# Altium PCB AVR Board 4.0 R1.2 Alternate.PcbDoc (part 1 of 2)
Units mil, origin at the board's own origin, x right, y up, seen from the top; angles counter-clockwise.
Board outline 5050 x 3125 mil, 2 copper layers (Top Layer, Bottom Layer); 127 components, 141 nets, 588 pads, 126 vias.
Unrouted connection lines stored in the file: 100.
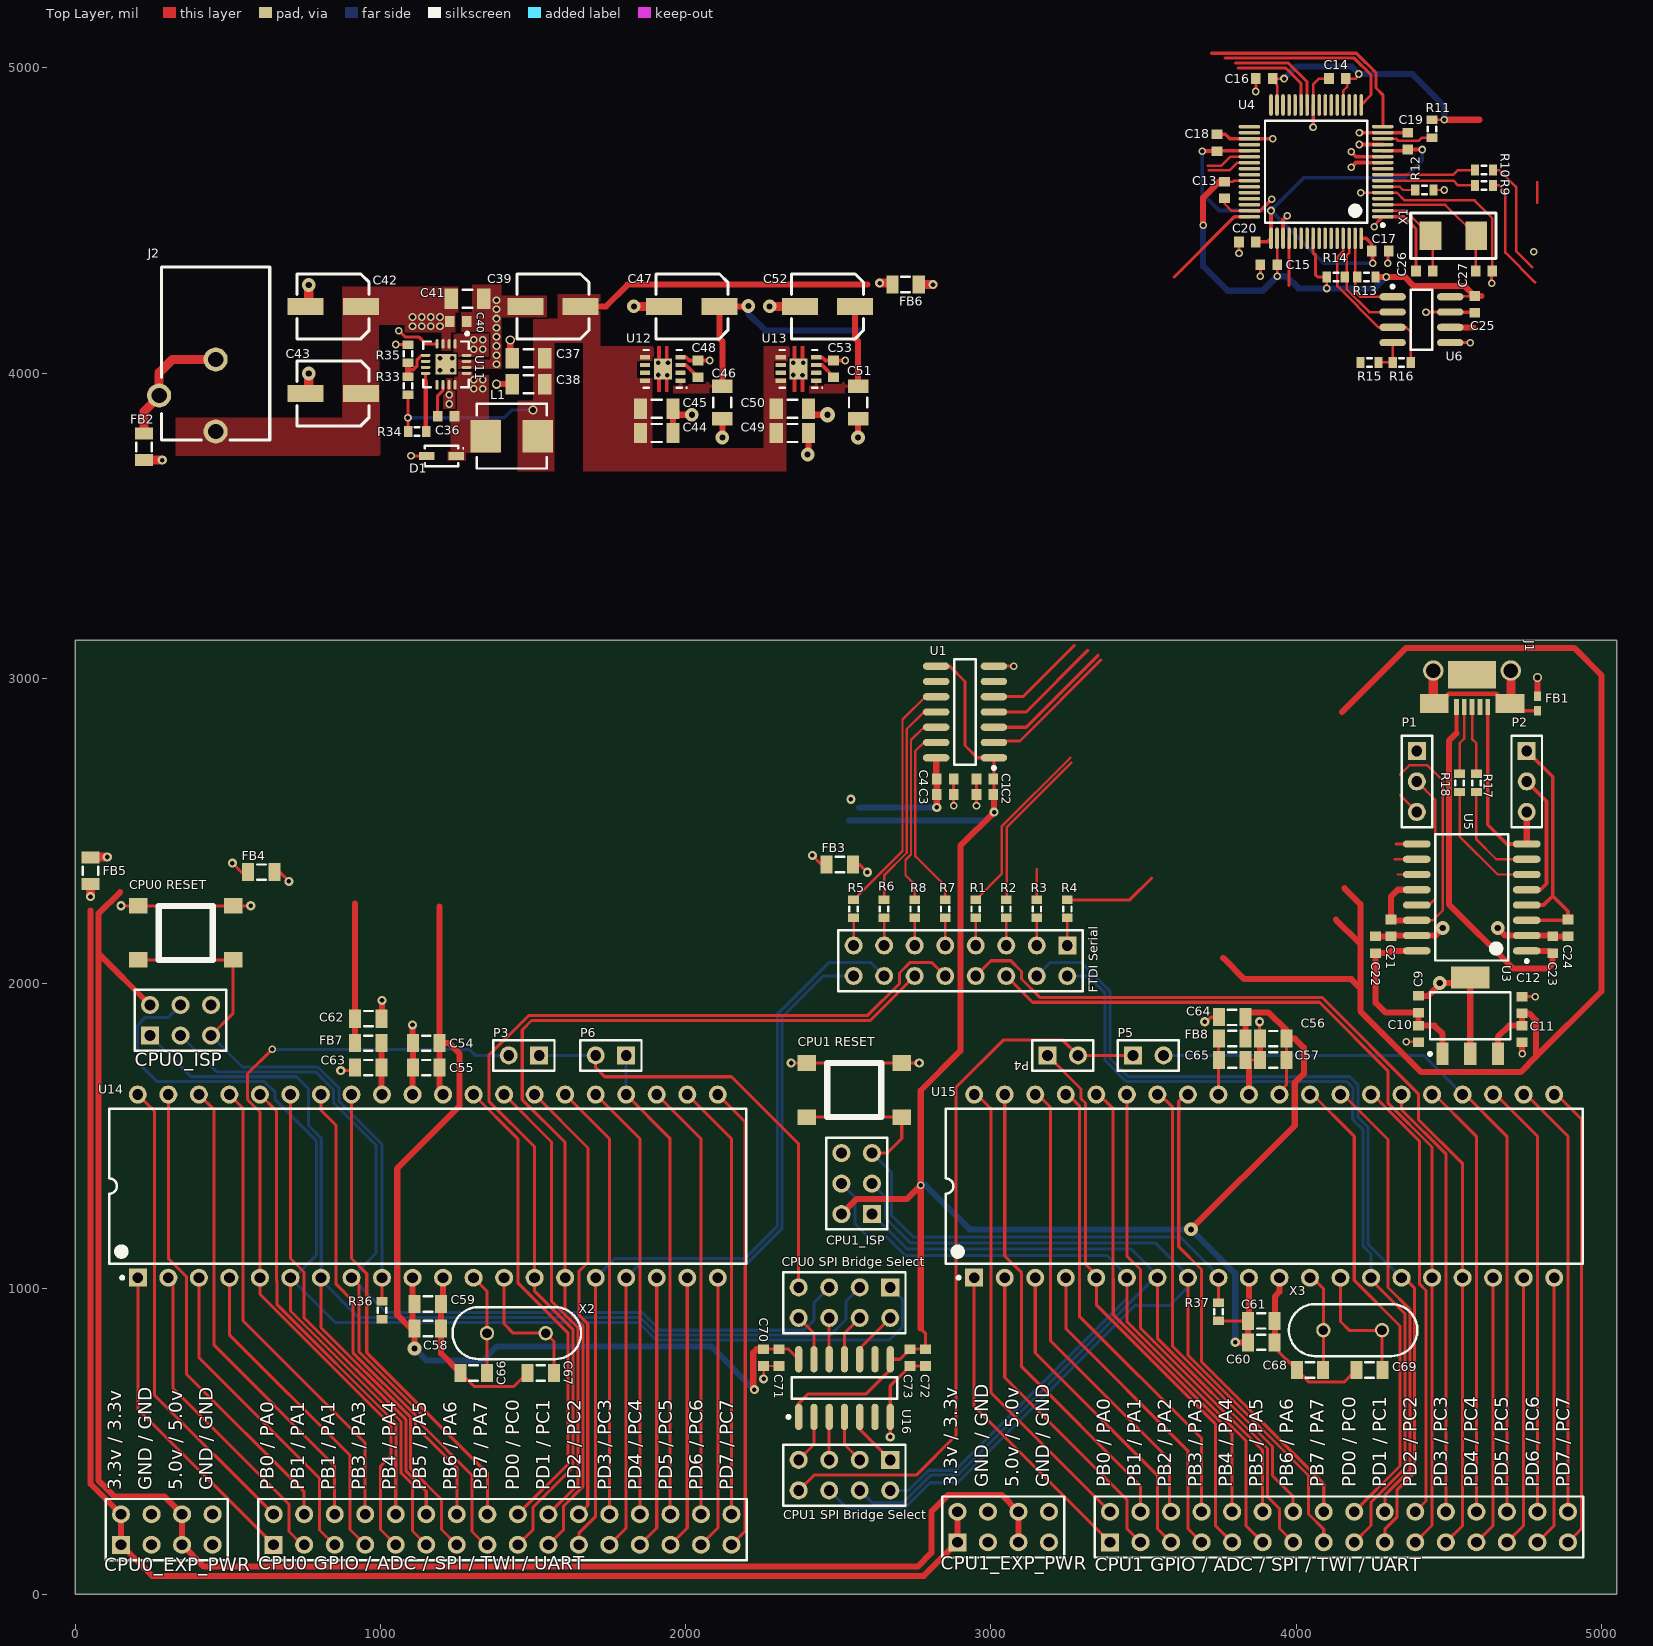
[diagram p0: Top Layer view]
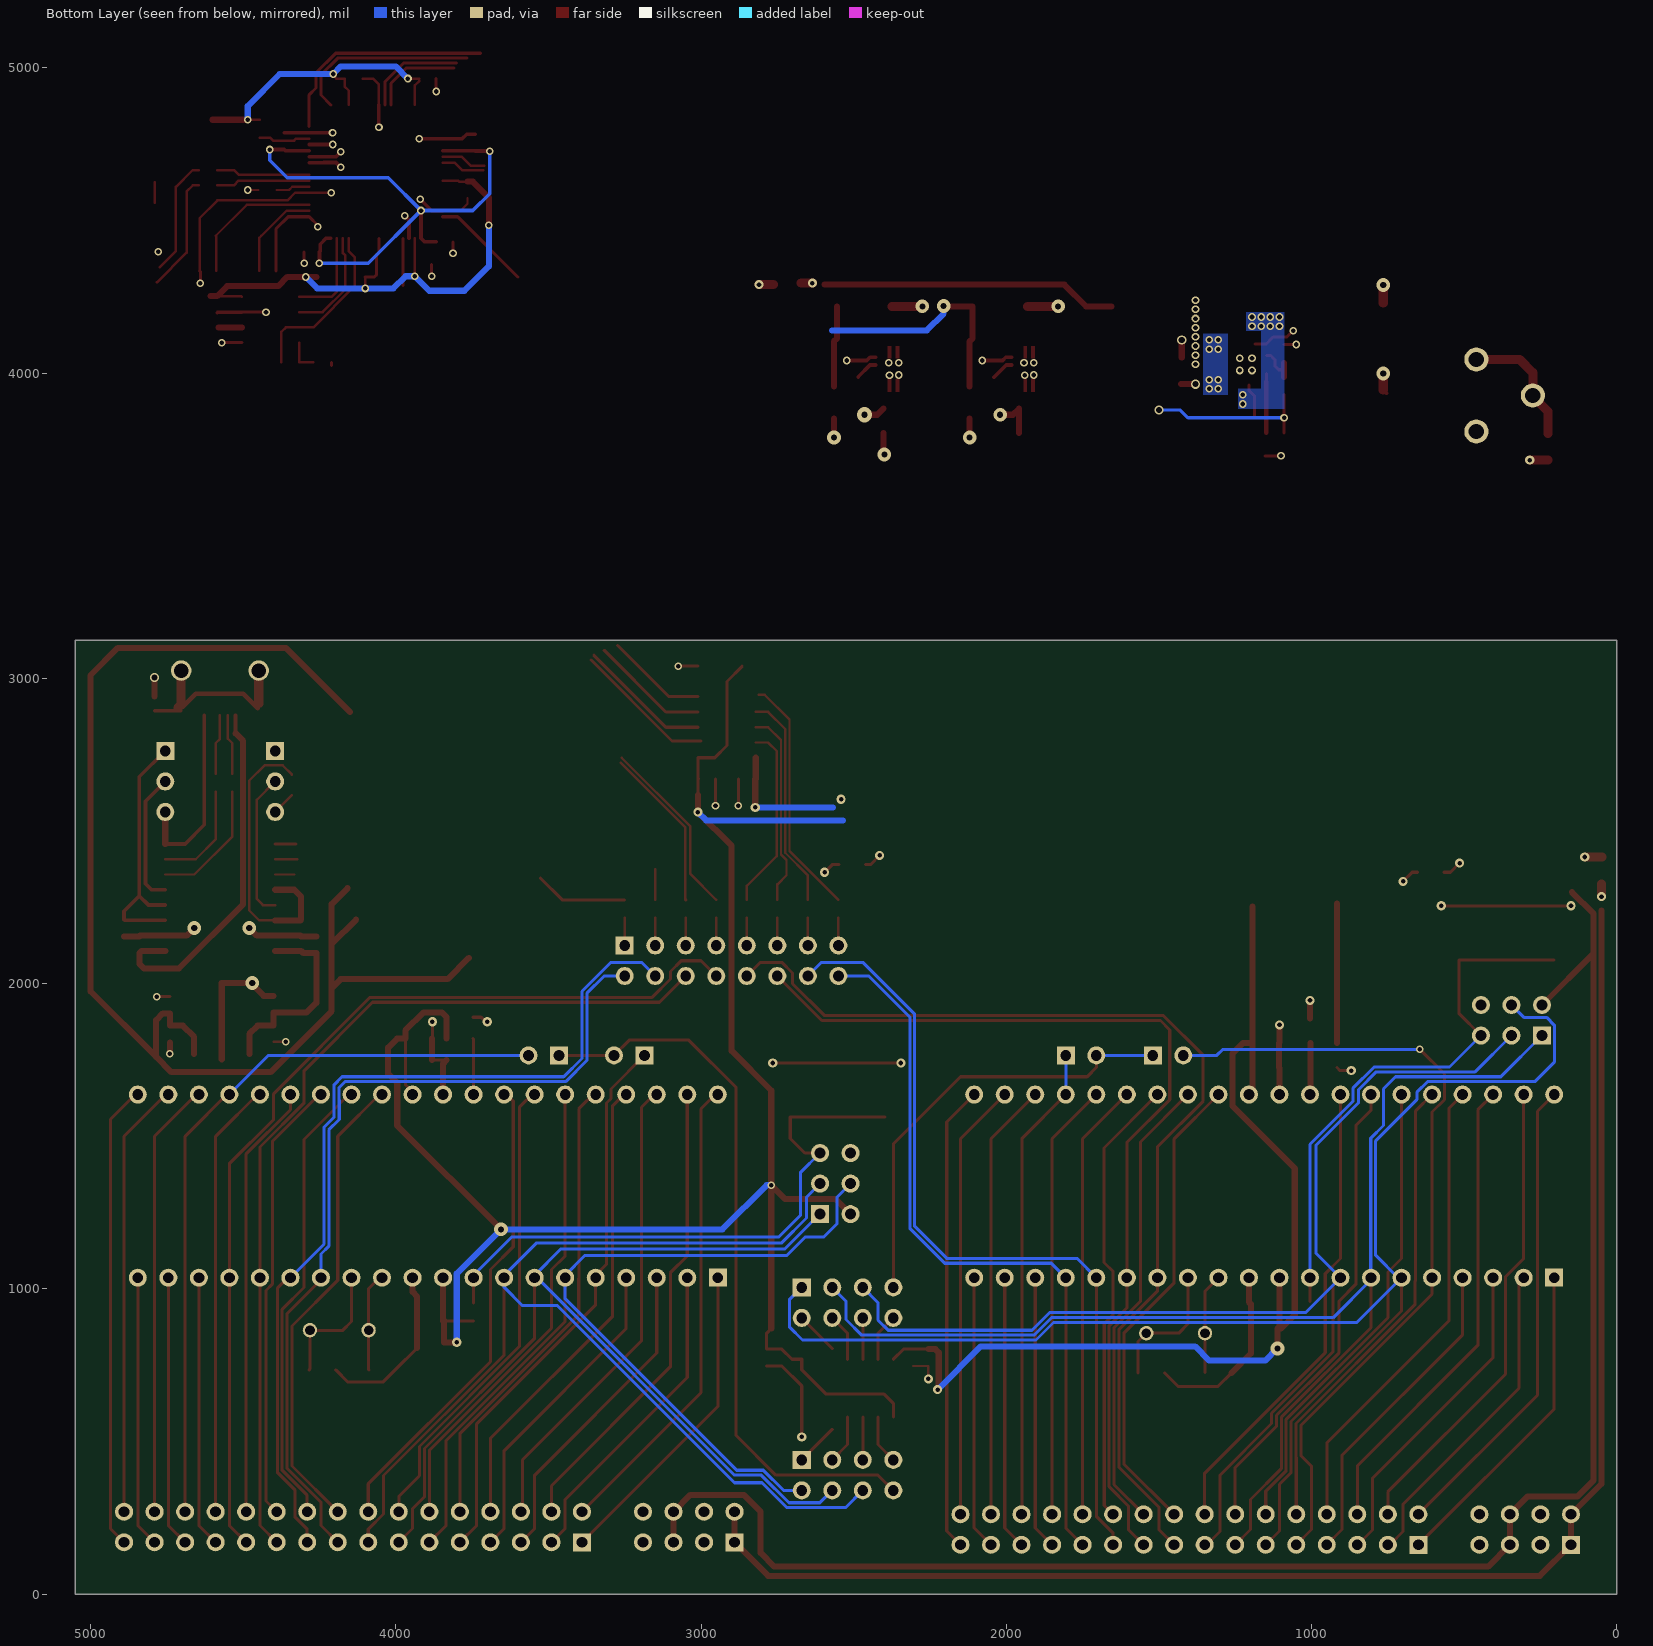
[diagram p1: Bottom Layer view, seen from below]

## Layer stack, top to bottom
Top Layer: signal copper 1.4
Dielectric: dielectric 12.6, FR-4, Dk 4.8
Bottom Layer: signal copper 1.4

## Board outline
0,0 0,3125 5050,3125 5050,0

## Design rules (kind name [scope] priority, off if disabled: settings)
Clearance [All] p1: gap=6
ComponentClearance [All] p1: gap=0 collisioncheckmode=3 verticalgap=10 showdistances=FALSE
FanoutControl Fanout_SOIC [(InComponent('U8') AND InComponent('U7'))] p3: bgadir=Out bgaviamode=Centered fanoutstyle=Staggered fanoutdirection=Alternating viagrid=1 // Fanout_SOIC (Default Rule)
FanoutControl Fanout_Small [All] p4: bgadir=Out bgaviamode=Centered fanoutstyle=Auto fanoutdirection=Alternating viagrid=1 // Fanout_Small (Default Rule)
HoleSize [All] p1: absolutevalues=TRUE maxlimit=120 minlimit=1 maxpercent=80.000 minpercent=20.000
MinimumSolderMaskSliver [All] p1 off: minsoldermaskwidth=10
MinimumSolderMaskSliver SilkscreenOverComponentPads [All] p2 off: minsoldermaskwidth=10
PlaneConnect [All] p1: planeconnectstyle=Direct reliefexpansion=20 reliefentries=4 reliefconductorwidth=10 reliefairgap=10
PolygonConnect PGND [InNet('PGND')] p1: connectstyle=Direct reliefconductorwidth=10 reliefentries=4 polygonreliefangle="90 Angle" airgapwidth=10
PolygonConnect PolygonConnect_3 [InNet('5VCC')] p2: connectstyle=Direct reliefconductorwidth=10 reliefentries=4 polygonreliefangle="90 Angle" airgapwidth=10
PolygonConnect PolygonConnect_2 [InNet('SW')] p3: connectstyle=Direct reliefconductorwidth=10 reliefentries=4 polygonreliefangle="90 Angle" airgapwidth=10
PolygonConnect PolygonConnect_1 [InNet('VIN')] p4: connectstyle=Direct reliefconductorwidth=10 reliefentries=4 polygonreliefangle="90 Angle" airgapwidth=10
PolygonConnect [All] p5: connectstyle=Relief reliefconductorwidth=10 reliefentries=4 polygonreliefangle="90 Angle" airgapwidth=10
RoutingVias [All] p1: holewidth=15 width=25 viastyle="Through Hole" minholewidth=15 minwidth=25 maxholewidth=28 maxwidth=50
SilkToSilkClearance [All] p1 off: silktosilkclearance=10
SolderMaskExpansion [All] p1: expansion=4
Width [All] p1: maxlimit=30 minlimit=6 preferedwidth=6 minimp=50.000000 maximp=50.000000 favimp=50.000000
21 further rules are at their usual default settings.

## Classes and differential pairs
component class Designator: C1 C2 C3 C4 C9 C10 C11 C12 C13 C14 C15 C16 C17 C18 C19 C20 C21 C22 C23 C24 C25 C26 C27 "CPU 1" "CPU 2" FB1 J1 P1 P2 R1 R2 R3 R4 R5 R6 R7 R8 R9 R10 R11 R12 R13 R14 R15 R16 R17 R18 U1 U3 U4 U5 U6 X1

## Components (designator, comment, footprint, x,y, rotation, side; value= is the part's Value field where it differs from the comment)
C1 "0603" 1608[0603] 2980,2670 r0 top
C2 "0603" 1608[0603] 2980,2620 r0 top
C3 "0603" 1608[0603] 2850,2620 r180 top
C4 "0603" 1608[0603] 2850,2670 r180 top
C9 "0603" 1608[0603] 4400,1932.5 r270 top
C10 "0603" 1608[0603] 4400,1835 r90 top
C11 "0603" 1608[0603] 4740,1835 r90 top
C12 "0603" 1608[0603] 4740,1930 r270 top
C13 "0603" 1608[0603] 3765,4600 r90 top
C14 "0603" 1608[0603] 4135,4965 r0 top
C15 "0603" 1608[0603] 3910,4355 r0 top
C16 "0603" 1608[0603] 3895,4965 r0 top
C17 "0603" 1608[0603] 4275,4400 r180 top
C18 "0603" 1608[0603] 3740,4755 r270 top
C19 "0603" 1608[0603] 4365,4760 r270 top
C20 "0603" 1608[0603] 3840,4430 r0 top
C21 "0603" 1608[0603] 4310,2182.5 r90 top
C22 "0603" 1608[0603] 4260,2127.5 r270 top
C23 "0603" 1608[0603] 4840,2127.5 r270 top
C24 "0603" 1608[0603] 4890,2182.5 r90 top
C25 "0603" 1608[0603] 4585,4225 r90 top
C26 "0603" 1608[0603] 4420,4335 r0 top
C27 "0603" 1608[0603] 4615,4335 r180 top
C36 "Cap Semi" 1608[0603] 1215,3858.78 r180 top
C37 "1206" C1206 1485,4048.78 r0 top
C38 "Cap Semi" C1206 1485,3963.78 r180 top
C39 "VS C" "Panasonic VS C" 1445,4103.78 r0 top
C40 "0603" 1608[0603] 1255,4168.78 r180 top
C41 "1206" C1206 1285,4243.78 r180 top
C42 "VS C" "Panasonic VS C" 725,4103.78 r0 top
C43 "VS C" "Panasonic VS C" 725,3818.78 r0 top
C44 "1206 Tantulum" C1206 1905,3803.78 r0 top
C45 "1206 Tantulum" C1206 1905,3883.78 r180 top
C46 "1206 Tantulum" C1206 2120,3903.78 r270 top
C47 "VS C" "Panasonic VS C" 1900,4103.78 r0 top
C48 "0603" 1608[0603] 2040,4013.78 r270 top
C49 "1206 Tantulum" C1206 2349.45,3803.78 r0 top
C50 "1206 Tantulum" C1206 2349.45,3883.78 r180 top
C51 "1206 Tantulum" C1206 2564.45,3903.78 r270 top
C52 "VS C" "Panasonic VS C" 2344.45,4103.78 r0 top
C53 "0603" 1608[0603] 2484.45,4013.78 r270 top
C54 "0805" "SM 0805 - gap trimmed" 1150,1805 r0 top
C55 "0805" "SM 0805 - gap trimmed" 1150,1725 r0 top
C56 "0805" "SM 0805 - gap trimmed" 3925,1820 r0 top
C57 "0805" "SM 0805 - gap trimmed" 3925,1750 r0 top
C58 "0805" "SM 0805 - gap trimmed" 1155,870 r180 top
C59 "0805" "SM 0805 - gap trimmed" 1155,950 r180 top
C60 "0805" "SM 0805 - gap trimmed" 3885,825 r180 top
C61 "0805" "SM 0805 - gap trimmed" 3885,895 r180 top
C62 "0805" "SM 0805 - gap trimmed" 960,1885 r180 top
C63 "0805" "SM 0805 - gap trimmed" 960,1725 r0 top
C64 "0805" "SM 0805 - gap trimmed" 3790,1890 r0 top
C65 "0805" "SM 0805 - gap trimmed" 3790,1750 r180 top
C66 "0805" "SM 0805 - gap trimmed" 1305,725 r0 top
C67 "0805" "SM 0805 - gap trimmed" 1525,725 r0 top
C68 "0805" "SM 0805 - gap trimmed" 4045,735 r0 top
C69 "0805" "SM 0805 - gap trimmed" 4240,735 r0 top
C70 "0603" 1608[0603] 2255,775 r90 top
C71 "0603" 1608[0603] 2305,775 r90 top
C72 "0603" 1608[0603] 2785,775 r90 top
C73 "0603" 1608[0603] 2735,775 r90 top
"CPU0 GPIO / ADC / SPI / TWI / UART" "Header 16X2" HDR2X16 650,161.72 r0 top
"CPU0 RESET" "Tactile Switch" "Mountain Switch TS6324T1607" 490,2255 r270 top
"CPU0 SPI Bridge Select" "Header 4X2" HDR2X4 2670,1005 r180 top
CPU0_EXP_PWR "Header 4X2" HDR2X4 150,161.72 r0 top
CPU0_ISP "Header 3X2" HDR2X3 245,1830 r0 top
"CPU1 GPIO / ADC / SPI / TWI / UART" "Header 16X2" HDR2X16 3390,170 r0 top
"CPU1 RESET" "Tactile Switch" "Mountain Switch TS6324T1607" 2680,1740 r270 top
"CPU1 SPI Bridge Select" "Header 4X2" HDR2X4 2670,440 r180 top
CPU1_EXP_PWR "Header 4X2" HDR2X4 2890,170 r0 top
CPU1_ISP "Header 3X2" HDR2X3 2610,1245 r90 top
D1 "PMEG1030EH_EJ" PMEG1030EH_EJ 1200,3728.78 r0 top
FB1 "BLM18PG121SN1D" BLM18PG121SN1D 4790,2917.5 r90 top
FB2 "MI0805L301R-10" "SM 0805 - gap trimmed" 225,3758.78 r90 top
FB3 "MI0805L301R-10" "SM 0805 - gap trimmed" 2505,2390 r180 top
FB4 "MI0805L301R-10" "SM 0805 - gap trimmed" 610,2365 r180 top
FB5 "MI0805L301R-10" "SM 0805 - gap trimmed" 50,2370 r90 top
FB6 "MI0805L301R-10" "SM 0805 - gap trimmed" 2720,4290 r180 top
FB7 "Inductor" "SM 0805 - gap trimmed" 960,1805 r0 top
FB8 "Inductor" "SM 0805 - gap trimmed" 3790,1820 r180 top
"FTDI Serial" "Header 8X2" HDR2X8 3250,2125 r180 top
J1 "DX4R005J91R5100" "Micro USB Circular Holes Only" 4575,3065 r180 top
J2 "Center-positive 2.1 mm power jack" PJ-102AH 460,3808.78 r0 top
L1 "Inductor" CIP0530LR3R3 1430,3793.78 r0 top
P1 "Header 3" HDR1X3 4395,2762.5 r270 top
P2 "Header 3" HDR1X3 4755,2762.5 r270 top
P3 "Header 2" HDR1X2 1520,1765 r180 top
P4 "Header 2" HDR1X2 3185,1765 r0 top
P5 "Header 2" HDR1X2 3465,1765 r0 top
P6 "Header 2" HDR1X2 1805,1765 r180 top
R1 "0603" J1-0603 2950,2245 r270 top
R2 "0603" J1-0603 3050,2245 r270 top
R3 "0603" J1-0603 3150,2245 r270 top
R4 "0603" J1-0603 3250,2245 r270 top
R5 "0603" J1-0603 2550,2245 r270 top
R6 "0603" J1-0603 2650,2245 r270 top
R7 "0603" J1-0603 2850,2245 r270 top
R8 "0603" J1-0603 2750,2245 r270 top
R9 "0603" J1-0603 4615,4615 r180 top
R10 "0603" J1-0603 4615,4665 r180 top
R11 "0603" J1-0603 4445,4800 r90 top
R12 "0603" J1-0603 4420,4600 r0 top
R13 "0603" J1-0603 4230,4315 r0 top
R14 "0603" J1-0603 4130,4315 r180 top
R15 "0603" J1-0603 4240,4035 r180 top
R16 "0603" J1-0603 4345,4035 r0 top
R17 "0603" J1-0603 4590,2657.5 r270 top
R18 "0603" J1-0603 4535,2657.5 r270 top
R33 "Res3" J1-0603 1090,3958.78 r270 top
R34 "Res3" J1-0603 1120,3808.78 r0 top
R35 "Res3" J1-0603 1090,4063.78 r270 top
R36 "Res3" J1-0603 1005,930 r270 top
R37 "Res3" J1-0603 3745,925 r270 top
U1 "TXS0104E" SOIC127P600X175-14N 2915,2890 r180 top
U3 "UA78M05" SOT230P700X180-4N 4570,1895 r90 top
U4 "FT4232HL-Tray" LQFP-64_N 4065,4660 r180 top
U5 "ADuM4160" ADuM4160 4575,2282.5 r180 top
U6 "AT93C46" SOIC127P600X175-8N 4410,4175 r0 top
U11 "MIC24085" MIC24085-AYML 1215,4028.78 r270 top
U12 "TPS73733QDRBRQ1" TI-DRB8-1750X1500TP_V 1925,4013.78 r180 top
U13 "TPS73733QDRBRQ1" TI-DRB8-1750X1500TP_V 2369.45,4013.78 r180 top
U14 "ATmega1284-PU" 40P6 1155,1336.72 r90 top
U15 "ATmega1284-PU" 40P6 3895,1336.72 r90 top
U16 "TXS0104E" SOIC127P600X175-14N 2520,675 r90 top
X1 "12MHZ" 445C35A12M00000 4440,4450 r0 top
X2 "18.432MHZ" "radial 4.88" 1445,855 r0 top
X3 "18.432MHZ" "radial 4.88" 4185,865 r0 top

## Footprints (in the part's own frame and the unit in brackets; to place one, negate y for a bottom-side part, rotate by r counter-clockwise, add the part's x,y. Pads: shape width x height; smd on the part's side, far side on the other; paste and mask are expansions set on the pad)
40P6 [mm] "40-Pin Ceramic Dual In-Line Package (CerDIP)"
  rect 1.5x1.5 hole 0.9: 1(-7.62,24.13)
  round 1.5 hole 0.9: 2(-7.62,21.59) 3(-7.62,19.05) 4(-7.62,16.51) 5(-7.62,13.97) 6(-7.62,11.43) 7(-7.62,8.89) 8(-7.62,6.35) 9(-7.62,3.81) 10(-7.62,1.27) 11(-7.62,-1.27) 12(-7.62,-3.81) 13(-7.62,-6.35) 14(-7.62,-8.89) 15(-7.62,-11.43) 16(-7.62,-13.97) 17(-7.62,-16.51) 18(-7.62,-19.05) 19(-7.62,-21.59) 20(-7.62,-24.13) 21(7.62,-24.13) 22(7.62,-21.59) 23(7.62,-19.05) 24(7.62,-16.51) 25(7.62,-13.97) 26(7.62,-11.43) 27(7.62,-8.89) 28(7.62,-6.35) 29(7.62,-3.81) 30(7.62,-1.27) 31(7.62,1.27) 32(7.62,3.81) 33(7.62,6.35) 34(7.62,8.89) 35(7.62,11.43) 36(7.62,13.97) 37(7.62,16.51) 38(7.62,19.05) 39(7.62,21.59) 40(7.62,24.13)
  silkscreen extent -7.74,-26.5 6.45,26.5, body extent -7.05,-26.47 7.05,26.47, height 4.83
445C35A12M00000 [mm] "Crystal Oscillator"
  rect 1.8x2.4 smd: 1(0,0) 2(3.8,0)
  silkscreen extent -1.65,-1.91 5.46,1.91, body extent -1.27,-1.52 5.08,1.52, height 1
1608[0603] [mm] "Chip Capacitor, Body 1.6x0.8mm, IPC High Density"
  rect 0.8x0.9 smd: 1(-0.7,0) 2(0.7,0)
  body extent -0.87,-0.48 0.87,0.48, height 1.3
ADuM4160 [mm] "SOIC, 16-Leads, Body 10.30x7.50mm, Pitch 1.27mm, IPC Medium Density"
  oval 2.3x0.6 smd: 1(-4.575,4.445) 2(-4.575,3.175) 3(-4.575,1.905) 4(-4.575,0.635) 5(-4.575,-0.635) 6(-4.575,-1.905) 7(-4.575,-3.175) 8(-4.575,-4.445) 9(4.575,-4.445) 10(4.575,-3.175) 11(4.575,-1.905) 12(4.575,-0.635) 13(4.575,0.635) 14(4.575,1.905) 15(4.575,3.175) 16(4.575,4.445)
  silkscreen extent -4.7,-5.25 3.03,5.42, body extent -3.8,-5.25 3.8,5.25, height 2.65
BLM18PG121SN1D [mm] "Chip Inductor, 2-Leads, Body 1.0x0.5mm, IPC Medium Density"
  rect 0.8x0.6 smd: 1(-0.6,0) 2(0.6,0)
  body extent -0.52,-0.28 0.53,0.27, height 0.6
C1206 [mm] "Chip Capacitor, Body 3.2x1.6mm, IPC High Density"
  rect 1.1x1.7 smd: 1(-1.35,0) 2(1.35,0)
  silkscreen extent -0.4,-0.75 0.4,0.75, body extent -1.7,-0.9 1.7,0.9, height 1.3
CIP0530LR3R3 [mm] "Precision Wire Wound Inductor, 2-Leads, Body 5.58x5.30mm, IPC Medium Density"
  rect 2.55x2.7 smd: 1(-2.175,0) 2(2.175,0)
  silkscreen extent -2.9,-2.7 2.9,2.7, body extent -2.88,-2.7 2.88,2.7, height 2.29
HDR1X2 [mm] "Connector; Header; 2 Position"
  rect 1.5x1.5 hole 0.9: 1(0,0)
  round 1.5 hole 0.9: 2(2.54,0)
  silkscreen extent -1.27,-1.27 3.81,1.27
HDR1X3 [mm] "Connector; Header; 3 Position"
  rect 1.5x1.5 hole 0.9: 1(0,0)
  round 1.5 hole 0.9: 2(2.54,0) 3(5.08,0)
  silkscreen extent -1.27,-1.27 6.35,1.27
HDR2X3 [mm] "Connector; Header; 3x2 Position"
  rect 1.5x1.5 hole 0.9: 1(0,0)
  round 1.5 hole 0.9: 2(0,2.54) 3(2.54,0) 4(2.54,2.54) 5(5.08,0) 6(5.08,2.54)
  silkscreen extent -1.27,-1.27 6.35,3.81
HDR2X4 [mm] "Connector; Header; 4x2 Position"
  rect 1.5x1.5 hole 0.9: 1(0,0)
  round 1.5 hole 0.9: 2(0,2.54) 3(2.54,0) 4(2.54,2.54) 5(5.08,0) 6(5.08,2.54) 7(7.62,0) 8(7.62,2.54)
  silkscreen extent -1.27,-1.27 8.89,3.81
HDR2X8 [mm] "Connector; Header; 8x2 Position"
  rect 1.5x1.5 hole 0.9: 1(0,0)
  round 1.5 hole 0.9: 2(0,2.54) 3(2.54,0) 4(2.54,2.54) 5(5.08,0) 6(5.08,2.54) 7(7.62,0) 8(7.62,2.54) 9(10.16,0) 10(10.16,2.54) 11(12.7,0) 12(12.7,2.54) 13(15.24,0) 14(15.24,2.54) 15(17.78,0) 16(17.78,2.54)
  silkscreen extent -1.27,-1.27 19.05,3.81
HDR2X16 [mm] "Connector; Header; 16x2 Position"
  rect 1.5x1.5 hole 0.9: 1(0,0)
  round 1.5 hole 0.9: 2(0,2.54) 3(2.54,0) 4(2.54,2.54) 5(5.08,0) 6(5.08,2.54) 7(7.62,0) 8(7.62,2.54) 9(10.16,0) 10(10.16,2.54) 11(12.7,0) 12(12.7,2.54) 13(15.24,0) 14(15.24,2.54) 15(17.78,0) 16(17.78,2.54) 17(20.32,0) 18(20.32,2.54) 19(22.86,0) 20(22.86,2.54) 21(25.4,0) 22(25.4,2.54) 23(27.94,0) 24(27.94,2.54) 25(30.48,0) 26(30.48,2.54) 27(33.02,0) 28(33.02,2.54) 29(35.56,0) 30(35.56,2.54) 31(38.1,0) 32(38.1,2.54)
  silkscreen extent -1.27,-1.27 39.37,3.81
J1-0603 [mm] "Chip Resistor, Body 1.6x0.8mm, IPC High Density"
  rect 0.7x0.9 smd: 1(-0.75,0) 2(0.75,0)
  silkscreen extent -0.2,-0.35 0.2,0.35, body extent -0.85,-0.48 0.85,0.48, height 0.9
LQFP-64_N [mm] "Thin QFP, 64-Leads, Body 10x10mm, Pitch 0.5mm, IPC Medium Density"
  oval 1.8x0.3 smd: 1(-5.55,3.75) 2(-5.55,3.25) 3(-5.55,2.75) 4(-5.55,2.25) 5(-5.55,1.75) 6(-5.55,1.25) 7(-5.55,0.75) 8(-5.55,0.25) 9(-5.55,-0.25) 10(-5.55,-0.75) 11(-5.55,-1.25) 12(-5.55,-1.75) 13(-5.55,-2.25) 14(-5.55,-2.75) 15(-5.55,-3.25) 16(-5.55,-3.75) 33(5.55,-3.75) 34(5.55,-3.25) 35(5.55,-2.75) 36(5.55,-2.25) 37(5.55,-1.75) 38(5.55,-1.25) 39(5.55,-0.75) 40(5.55,-0.25) 41(5.55,0.25) 42(5.55,0.75) 43(5.55,1.25) 44(5.55,1.75) 45(5.55,2.25) 46(5.55,2.75) 47(5.55,3.25) 48(5.55,3.75)
  oval 0.3x1.8 smd: 17(-3.75,-5.55) 18(-3.25,-5.55) 19(-2.75,-5.55) 20(-2.25,-5.55) 21(-1.75,-5.55) 22(-1.25,-5.55) 23(-0.75,-5.55) 24(-0.25,-5.55) 25(0.25,-5.55) 26(0.75,-5.55) 27(1.25,-5.55) 28(1.75,-5.55) 29(2.25,-5.55) 30(2.75,-5.55) 31(3.25,-5.55) 32(3.75,-5.55) 49(3.75,5.55) 50(3.25,5.55) 51(2.75,5.55) 52(2.25,5.55) 53(1.75,5.55) 54(1.25,5.55) 55(0.75,5.55) 56(0.25,5.55) 57(-0.25,5.55) 58(-0.75,5.55) 59(-1.25,5.55) 60(-1.75,5.55) 61(-2.25,5.55) 62(-2.75,5.55) 63(-3.25,5.55) 64(-3.75,5.55)
  silkscreen extent -5.68,-4.25 4.25,4.57, body extent -5,-5 5,5, height 1.6
MIC24085-AYML [mm] "QFN, 16-Leads, Body 3.25x3.25mm, Pitch 0.50mm, Thermal Pad 1.73x1.73mm, IPC Medium Density"
  oval 0.8x0.25 smd: 1(-1.7,0.75) 2(-1.7,0.25) 3(-1.7,-0.25) 4(-1.7,-0.75) 9(1.7,-0.75) 10(1.7,-0.25) 11(1.7,0.25) 12(1.7,0.75)
  oval 0.25x0.8 smd: 5(-0.75,-1.7) 6(-0.25,-1.7) 7(0.25,-1.7) 8(0.75,-1.7) 13(0.75,1.7) 14(0.25,1.7) 15(-0.25,1.7) 16(-0.75,1.7)
  rect 1.73x1.73 smd: 17(0,0)
  silkscreen extent -2.67,-1.9 1.9,1.9, body extent -1.75,-1.75 1.75,1.75, height 0.85
"Micro USB Circular Holes Only" [mm]
  rect 0.4x1.35 smd: 1(1.275,4.025) 2(0.625,4.025) 3(-0.025,4.025) 4(-0.675,4.025) 5(-1.325,4.025)
  rect 2.4x1.6 smd: 6(3.125,3.75) 9(-3.175,3.75)
  round 1.7 hole 1.2: 7(3.2,1) 8(-3.25,1)
  rect 4x2.3 smd: GND(-0.025,1.35)
  body extent -4.1,-1.64 4.1,3.79, height 2.73
"Mountain Switch TS6324T1607" [mm]
  rect 1.3x1.55 smd: 1(0,0.7) 1(0,-7.2) 2(4.5,0.7) 2(4.5,-7.2)
  silkscreen extent 0,-5.5 4.5,-1
"Panasonic VS C" [mm]
  rect 3x1.4 smd: 1(5.348,2.921) 2(0.748,2.921)
  silkscreen extent 0.05,0.22 6.05,5.62
PJ-102AH [mm] "Center positive 2.1 mm power jack"
  round 2 hole 1.27: 1(0,0) 2(0,6) 3(-4.7,3)
  silkscreen extent -4.5,-0.7 4.5,13.7, body extent -5.8,-0.7 4.5,13.7, height 11
PMEG1030EH_EJ [mm] "Molded Diode, 2-Leads, Body 2.60x1.60mm, IPC Medium Density"
  rect 1.3x0.65 smd: 1(-1.225,0) 2(1.225,0)
  silkscreen extent -1.4,-0.85 1.85,0.85, body extent -1.35,-0.85 1.35,0.85, height 1.2
"radial 4.88" [mm]
  round 1.2 hole 0.8: 1(-2.44,0) 2(2.44,0)
  silkscreen extent -5.3,-2.16 5.38,2.16
"SM 0805 - gap trimmed" [mm]
  rect 1x1.5 smd: 1(-1.1,0) 2(1.1,0)
  silkscreen extent -0.36,-0.64 0.35,0.63
SOIC127P600X175-8N [mm] "SOIC, 8-Leads, Body 4.90x3.90mm, Pitch 1.27mm, IPC Medium Density"
  oval 2.2x0.6 smd: 1(-2.4,1.905) 2(-2.4,0.635) 3(-2.4,-0.635) 4(-2.4,-1.905) 5(2.4,-1.905) 6(2.4,-0.635) 7(2.4,0.635) 8(2.4,1.905)
  silkscreen extent -2.52,-2.5 0.9,2.88, body extent -2,-2.5 2,2.5, height 1.75
SOIC127P600X175-14N [mm] "SOIC, 14-Leads, Body 8.65x3.90mm, Pitch 1.27mm, IPC Medium Density"
  oval 2.2x0.6 smd: 1(-2.4,3.81) 2(-2.4,2.54) 3(-2.4,1.27) 4(-2.4,0) 5(-2.4,-1.27) 6(-2.4,-2.54) 7(-2.4,-3.81) 8(2.4,-3.81) 9(2.4,-2.54) 10(2.4,-1.27) 11(2.4,0) 12(2.4,1.27) 13(2.4,2.54) 14(2.4,3.81)
  silkscreen extent -2.53,-4.4 0.9,4.78, body extent -2,-4.4 2,4.4, height 1.75
SOT230P700X180-4N [mm] "SOT223, 4-Leads, Body 6.50x7.00mm (avg), Pitch 2.30mm, IPC Medium Density"
  rect 1.85x1 smd: 1(-3.175,2.3) 2(-3.175,0) 3(-3.175,-2.3)
  rect 1.85x3.2 smd: 4(3.175,0)
  silkscreen extent -3.3,-3.35 1.95,3.47, body extent -1.85,-3.35 1.85,3.35, height 1.8
TI-DRB8-1750X1500TP_V [mm] "SON, 8-Leads, Body 3x3mm, Pitch 0.65mm, Thermal Pad 1.50 x 3.8mm"
  rect 0.85x0.35 smd: 1(-1.475,0.975) 2(-1.475,0.325) 3(-1.475,-0.325) 4(-1.475,-0.975) 5(1.475,-0.975) 6(1.475,-0.325) 7(1.475,0.325) 8(1.475,0.975)
  rect 1.5x1.75 smd: 9(0,0)
  Top Layer region: 0.185,0.875 0.185,1.9 0.465,1.9 0.465,0.875
  Top Layer region: -0.185,-0.875 -0.185,-1.9 -0.465,-1.9 -0.465,-0.875
  Top Layer region: 0.185,-0.875 0.185,-1.9 0.465,-1.9 0.465,-0.875
  Top Layer region: -0.185,0.875 -0.185,1.9 -0.465,1.9 -0.465,0.875
  silkscreen extent -2.02,-1.58 1.57,1.62, body extent -1.5,-1.5 1.5,1.5, height 1

## Part data
C1 C2 C3 C4 C9 C10 C11 C12 C13 C14 C15 C16 C17 C18 C19 C20 C21 C22 C23 C24 C25 C26 C27 C37 C39 C40 C41 C44 C45 C46 C47 C48 C49 C50 C51 C52 C53 C54 C55 C56 C57 C58 C59 C60 C61 C62 C63 C64 C65 C66 C67 C68 C69 C70 C71 C72 C73: library part "Cap Semi", "Capacitor (Semiconductor SIM Model)"
C36 C38: "Capacitor (Semiconductor SIM Model)"
C42 C43: library part "Cap Pol3", "Polarized Capacitor (Surface Mount)"
"CPU0 GPIO / ADC / SPI / TWI / UART" "CPU1 GPIO / ADC / SPI / TWI / UART": "Header, 16-Pin, Dual row"
"CPU0 SPI Bridge Select" CPU0_EXP_PWR "CPU1 SPI Bridge Select" CPU1_EXP_PWR: "Header, 4-Pin, Dual row"
CPU0_ISP CPU1_ISP: "Header, 3-Pin, Dual row"
D1: library part Diode, "Default Diode"
FB2 FB3 FB4 FB5 FB6: library part Inductor, "Inductor"
"FTDI Serial": "Header, 8-Pin, Dual row"
J1: library part "Micro USB", "Micro USB Jack B"
J2: library part PWR2.5, "Power jack"
P1 P2: "Header, 3-Pin"
P3 P4 P5 P6: "Header, 2-Pin"
R1 R2 R3 R4 R5 R6 R7 R8 R9 R10 R11 R12 R13 R14 R15 R16 R17 R18: library part Res3, "Resistor"
R33 R34 R35 R36 R37: "Resistor"
U4: "Quad High Speed USB To Multipurpose UART/MPSSE IC, 64-pin LQFP, Tray"
U5: "USB Opto Isolator"
U12 U13: "Single Output Automotive LDO, 1 A, Fixed 3.3 V Output, 2.2 to 5.5 V Input, with Reverse Current Protection, 8-pin SON (DRB), -40 to 125 degC, Green (RoHS & no Sb/Br)"
U14 U15: "8-bit AVR Microcontroller, 128KB Flash, 4KB EEPROM, 16KB SRAM, 40-pin PDIP, Industrial Grade (-40°C to 85°C)"
X1 X2 X3: library part XTAL, "Crystal Oscillator"

## Via types
v1: diameter 25, hole 15, Top Layer to Bottom Layer, 82 vias
v2: diameter 30, hole 15, Top Layer to Bottom Layer, 25 vias
v3: diameter 45, hole 20, Top Layer to Bottom Layer, 14 vias
v4: diameter 30, hole 20, Top Layer to Bottom Layer, 4 vias
v5: diameter 50, hole 20, Top Layer to Bottom Layer, 1 vias

## Nets (pads, with @x,y where several pads share a name; then routed paths per layer and width w, separated by ;. In a path a pad name is that pad's centre, name@x,y a point inside that pad or via, vN(x,y) a via of type N, cw(c..) or ccw(c..) an arc to the next point about the centre after c; other vN are vias at no path point)
3.3VCC: C1.2 C2.2 C46.1 C47.1 C56.2 C57.2 C60.2 C61.2 C64.2 C72.2 C73.2 CPU1_ISP.2 FB8.1 R37.2 U1.1 U1.8 U12.1 U15.10 U15.30 U16.1 U16.8 | length 7543.9
  Top Layer w10: U16.1@2370,580.51 2370,625 2400,655 2590,655 2670,735 U16.8@2670,769.49 2701.93,769.49 C73.2@2735,802.56 C72.2@2785,802.56 2785,855 2770,870 ; 2865,3040 2915,2990 2915,2780 2955,2740 U1.1@3009.49,2740 3009.49,2671.93 C1.2@3007.56,2670 ; C2.2@3007.56,2620 C2.2@3010,2617.56 ; C2.2@3009.49,2621.93 C1.2@3009.49,2670 ; R37.2@3745,895.47 C61.2@3841.22,895.47 ; U15.30@3945,1645 3968.31,1668.31 C57.2@3968.31,1750 C56.2@3968.31,1820
  Top Layer w20: C46.1@2120,3956.93 2120,4103.78 2110.55,4113.23 C47.1@2110.55,4218.78 v3@2203.78,4218.78 ; CPU1_ISP.2@2510,1245 2560,1295 2725,1295 v1(2770,1340) ; 2770,870 v1(2770,1340) ; C2.2@3010,2617.56 v2(3010,2562.03) 2900,2452.03 2900,1780 2770,1650 v1(2770,1340) ; v3(3655,1195) 3995,1535 3995,1675 4025,1705 4025,1790 3995,1820 C56.2@3968.31,1820 3968.31,1846.69 3909,1906 3849.31,1906 C64.2@3833.31,1890 FB8.1@3833.31,1820 ; v2(3800,825) C60.2@3841.69,825 C61.2@3841.69,895 C61.2@3841.22,895.47 ; C61.2@3845,895 U15.10@3845,1036.72 U15.10@3845,1045
  Bottom Layer w20: v3(2205,4220) 2205,4195 2260,4140 2570,4140 ; 2535,2535 2982.97,2535 v2(3010,2562.03) ; v1(2770,1340) 2785,1340 2930,1195 v3(3655,1195) 3800,1050 v2(3800,825)
3.3VCC_2: C11.2 C12.2 C13.2 C14.2 C15.2 C16.2 C25.2 R11.2 R13.2 R14.2 R15.2 U3.3 U4.20 U4.31 U4.42 U4.50 U4.56 U6.6 U6.8 | length 7392.2
  Top Layer w8: C13.2@3765,4627.56 3792.56,4627.56 3795,4630 3846.02,4630 U4.42@3846.5,4630.47 ; C16.2@3922.56,4957.44 3937.05,4942.95 U4.31@3937.05,4878.5 ; C16.2@3922.56,4965 v1(3960,4965) ; U4.50@3937.05,4441.5 3937.05,4355.51 C15.2@3937.56,4355 v1(3937.56,4317.44) ; v1(4100.47,4277.44) R14.2@4100.47,4315 ; U4.20@4153.58,4878.5 4153.58,4925.05 4167.44,4938.91 4167.44,4965 4195,4965 4205,4975 v1(4205,4980) ; R11.2@4445,4829.53 4484.53,4829.53 v1(4485,4830) ; U6.8@4504.49,4250 4507.05,4252.56 C25.2@4585,4252.56
  Top Layer w10: U4.56@4055.16,4441.5 4055.16,4394.84 4062.56,4387.44 4062.56,4322.44 4070,4315 R14.2@4100.47,4315 ; R15.2@4210.47,4024.53 R15.2@4210.47,4035
  Top Layer w20: v1(3695,4485) 3695,4575 3747.56,4627.56 C13.2@3765,4627.56 ; 3760.47,2084.53 3830,2015 4180,2015 4210,1985 ; 4130,2210 4210,2130 ; 4150,2890 4360,3100 4910,3100 5000,3010 5000,1975 4785,1760 ; 4157.44,2312.56 4210,2260 4210,1985 ; R13.2@4259.53,4315 v1(4295,4315) 4355,4315 4385,4285 4552.56,4285 C25.2@4585,4252.56 4607.44,4252.56 ; v1(4485,4830) 4600,4830 ; U6.6@4504.49,4150 4580,4150 ; U3.3@4660.55,1770 4660.55,1825.55 4697.56,1862.56 C11.2@4740,1862.56 C12.2@4740,1902.44 4762.56,1902.44 4785,1880 4785,1760 ; 4210,1985 4210,1910 4410,1710 4735,1710 4785,1760
  Bottom Layer w20: v1(3695,4485) 3695,4350 3775,4270 3890.12,4270 v1(3937.56,4317.44) 3967.56,4317.44 4007.56,4277.44 v1(4100.47,4277.44) 4257.44,4277.44 v1(4295,4315) ; v1(3960,4965) 4000,5005 4180,5005 v1(4205,4980) 4380,4980 4485,4875 v1(4485,4830)
3.3VCC_3: C51.1 C52.1 CPU0_EXP_PWR.1 CPU0_EXP_PWR.2 CPU1_EXP_PWR.1 CPU1_EXP_PWR.2 U13.1 | length 5313.2
  Top Layer w20: 50,2240 50,361.72 CPU0_EXP_PWR.2@150,261.72 CPU0_EXP_PWR.1@150,161.72 251.72,60 2780,60 CPU1_EXP_PWR.1@2890,170 CPU1_EXP_PWR.2@2890,270 ; C52.1@2555,4218.78 2555,4113.23 2564.45,4103.78 C51.1@2564.45,3956.93
5VCC: C3.2 C4.2 C37.2 C38.1 C39.1 C44.1 C45.2 C49.1 C50.2 C54.2 C55.2 C58.2 C59.2 C62.2 C70.2 C71.2 CPU0_EXP_PWR.5 CPU0_EXP_PWR.6 CPU0_ISP.2 CPU1_EXP_PWR.5 CPU1_EXP_PWR.6 FB7.1 L1.2 R33.2 R34.1 R36.2 U1.14 U12.5 U12.8 U13.5 U13.8 U14.10 U14.30 U16.14 | length 11522.5
  Top Layer w10: R34.1@1090,3804.25 v1(1090,3853.78) R33.2@1090,3929.25 ; C70.2@2255,802.56 C71.2@2305,802.56 2336.93,802.56 U16.14@2370,769.49
  Top Layer w20: 146.77,2300 76,2229.23 76,2099 ; CPU0_ISP.2@245,1930 76,2099 ; FB7.1@916.69,1805 C62.2@916.69,1885 916.69,2261.69 ; U14.10@1105,1036.72 1105,876.69 C58.2@1111.69,870 ; v3(1111.69,805) C58.2@1111.69,870 ; 1193.31,2253.31 C54.2@1193.31,1805 ; U14.30@1205,1636.72 1193.31,1648.41 C55.2@1193.31,1725 C54.2@1193.31,1805 ; C39.1@1655.55,4218.78 1738.78,4218.78 1810,4290 2595,4290 ; v2(2225,670) 2221.28,673.72 2221.28,791.28 2232.56,802.56 C70.2@2255,802.56 ; C4.2@2820.51,2670 U1.14@2820.51,2740 ; v2(2822.44,2577.44) C3.2@2822.44,2620 C4.2@2822.44,2670 ; CPU1_EXP_PWR.5@3090,170 CPU1_EXP_PWR.6@3090,270 3035,325 2860,325 2805,270 2805,135 2760,90 421.72,90 CPU0_EXP_PWR.5@350,161.72 CPU0_EXP_PWR.6@350,261.72 291.72,320 128.49,320 76,372.49 76,2099 ; C58.2@1111.69,870 1100,870 1055,915 1055,1395 1259.47,1599.47 1259.47,1770.53 1225,1805 C54.2@1193.31,1805
  Bottom Layer w10: v1(1090,3853.78) 1405,3853.78 1430,3878.78 v4(1500,3878.78)
  Bottom Layer w20: v3(1111.69,805) 1151.69,765 1335,765 1381.47,811.47 2083.53,811.47 v2(2225,670) ; 2567.67,2577.44 v2(2822.44,2577.44)
  other v2: 2541,2604.11
BST: C36.2 U11.10 | length 110.4
  Top Layer w10: C36.2@1187.44,3858.78 1187.44,3926.22 1205.16,3943.94 U11.10@1205.16,3961.85
CC_SS0: "CPU0 GPIO / ADC / SPI / TWI / UART.9" P3.2 U14.5 | length 2670
  Top Layer w10: v1(645,1785) 564.47,1704.47 564.47,1619.93 605,1579.4 U14.5@605,1036.72 605,982.63 1035,552.63 1035,454.49 1000,419.49 1000,211.72 1050,161.72
  Bottom Layer w10: v1(645,1785) 1290,1785 1310,1765 P3.2@1420,1765
CPU0_RESET: "CPU0 RESET.2" CPU0_ISP.5 R36.1 U14.9 | length 1852.4
  Top Layer w10: 206.54,2077.83 517.56,2077.83 517.56,1902.56 CPU0_ISP.5@445,1830 ; R36.1@1005,959.53 U14.9@1005,1036.72
  Bottom Layer w10: CPU0_ISP.5@445,1830 548,1727 794.66,1727 864.47,1657.19 864.47,1614.21 1005,1473.68 1005,1048.43 993.28,1036.72 U14.9@1005,1036.72
CPU1_RESET: "CPU1 RESET.2" CPU1_ISP.5 R37.1 U15.9 | length 1971.7
  Top Layer w10: 2396.54,1562.83 2707.56,1562.83 2707.56,1492.56 2660,1445 CPU1_ISP.5@2610,1445 ; R37.1@3745,954.53 U15.9@3745,1045
  Bottom Layer w10: CPU1_ISP.5@2610,1445 2674.53,1380.47 2674.53,1240.47 2745,1170 3620,1170 U15.9@3745,1045
FB: R33.1 R35.2 U11.5 | length 134.9
  Top Layer w10: 1090,4011.04 1107.26,4011.04 1120,4023.78 1120,4043.89 1134.41,4058.31 U11.5@1148.07,4058.31
  Top Layer w20: R33.1@1090,3988.31 R35.2@1090,4033.78
GND: "CPU0 RESET.1" "CPU1 RESET.1" C1.1 C2.1 C3.1 C4.1 C9.1 C10.1 C11.1 C12.1 C13.1 C14.1 C15.1 C16.1 C17.1 C18.1 C19.1 C20.1 C21.1 C22.1 C25.1 C26.1 C27.1 C54.1 C55.1 C56.1 C57.1 C58.1 C59.1 C60.1 C61.1 C62.1 C63.1 C64.1 C65.1 C66.1 C67.1 C68.1 C69.1 C70.1 C71.1 C72.1 C73.1 CPU0_EXP_PWR.3 CPU0_EXP_PWR.4 CPU0_EXP_PWR.7 CPU0_EXP_PWR.8 CPU0_ISP.6 CPU1_EXP_PWR.3 CPU1_EXP_PWR.4 CPU1_EXP_PWR.7 CPU1_EXP_PWR.8 CPU1_ISP.6 FB3.1 FB4.1 FB5.1 FB6.1 P1.1 R12.2 U1.7 U3.2 U3.4 U4.1 U4.5 U4.10 U4.11 U4.13 U4.15 U4.25 U4.35 U4.47 U4.51 U5.9 U5.15 U6.5 U6.7 U14.11 U14.31 U15.11 U15.31 U16.7 | length 6921.3
  Top Layer w8: C62.1@1003.31,1885 C62.1@1005,1886.69 ; C54.1@1105,1806.69 C54.1@1106.69,1805 ; v2(2255,705) C70.1@2255,747.44 C71.1@2305,747.44 ; C13.1@3765,4572.44 3765,4555 3787.95,4532.05 U4.47@3846.5,4532.05 ; U4.25@4055.16,4878.5 4055.16,4945.16 4075,4965 C14.1@4107.44,4965 ; v1(4211.1,4591.1) U4.5@4283.5,4591.1 4329.63,4591.1 4355,4565.73 4584.27,4565.73 4642.56,4507.44 C27.1@4642.56,4335 ; U4.15@4283.5,4787.95 U4.15@4283.9,4787.56 ; v1@4362.44,1810 C10.1@4400,1810 ; R12.2@4449.53,4600 v1(4485,4600)
  Top Layer w10: v2(150,2255) 206.54,2255 517.56,2255 v2(575,2255) ; FB4.1@653.31,2365 670,2365 v2(700,2335) ; v2(870,1715) 906.69,1715 C63.1@916.69,1725 ; C55.1@1105,1723.31 C55.1@1106.69,1725 ; C66.1@1261.69,725 1306.69,680 1436.69,680 C67.1@1481.69,725 ; v2(2345,1740) 2396.54,1740 2707.56,1740 v2(2765,1740) ; FB3.1@2548.31,2390 2570,2390 v2(2595,2365) ; v2(2670,515) U16.7@2670,580.51 2670,682.44 C73.1@2735,747.44 C72.1@2785,747.44 ; v1(2877.56,2582.44) C3.1@2877.56,2620 C4.1@2877.56,2670 ; v1(2952.44,2582.44) C2.1@2952.44,2620 C1.1@2952.44,2670 ; U1.7@3009.49,3040 v1(3075,3040) ; v2(3700,1875) 3705,1875 3720,1890 C64.1@3746.69,1890 ; v1(3812.44,4392.44) C20.1@3812.44,4430 ; C65.1@3833.31,1750 C57.1@3881.69,1750 ; v1(3867.44,4922.56) C16.1@3867.44,4965 ; v2(3880,1875) 3880,1821.69 C56.1@3881.69,1820 ; v1(3882.44,4317.44) C15.1@3882.44,4355 ; C60.1@3930,806.69 C68.1@4001.69,735 4042.22,694.47 4156.17,694.47 C69.1@4196.69,735 ; v1(4255,4480) 4255,4483.86 U4.1@4283.5,4512.36 4352.64,4512.36 4392.44,4472.56 C26.1@4392.44,4335 ; v1(4300,4360) C17.1@4300,4397.44 ; 4327.5,2457.5 U5.9@4394.88,2457.5 ; v1(4425,4200) U6.7@4504.49,4200 ; U6.5@4504.49,4100 v1(4570,4100) ; v1(4640,4295) 4640,4332.44 C27.1@4642.56,4335 ; C12.1@4740,1957.56 v1(4782.56,1957.56)
  Top Layer w12: C18.1@3740,4782.56 3767.44,4782.56 3781.73,4768.27 U4.35@3846.5,4768.27 v1(3923.27,4768.27) ; U4.47@3846.5,4532.05 3882.05,4532.05 v1(3920,4570) ; U4.51@3956.73,4441.5 3956.73,4501.73 v1(3970,4515) ; v1@4055.16,4805.16 U4.25@4055.16,4878.5 ; v1(4180,4674.53) 4195.47,4690 4235,4690 4235.47,4689.53 U4.10@4283.5,4689.53 ; v1(4180,4725) 4195.79,4709.21 U4.11@4283.5,4709.21 ; v1(4206.65,4748.98) U4.13@4283.11,4748.98 ; v1(4207.05,4787.95) U4.15@4283.5,4787.95 ; U4.15@4283.9,4787.56 C19.1@4365,4787.56 ; U6.7@4504.49,4200 4582.44,4200 C25.1@4585,4197.44
  Top Layer w20: C62.1@1005,1886.69 v2(1005,1945) ; U14.31@1105,1636.72 C55.1@1105,1723.31 ; C54.1@1105,1806.69 v2(1105,1865) ; C55.1@1106.69,1725 C54.1@1106.69,1805 ; U14.11@1205,1036.72 1205,956.69 C59.1@1198.31,950 C58.1@1198.31,870 1198.31,788.39 C66.1@1261.69,725 ; C65.1@3833.31,1750 3845,1738.31 U15.31@3845,1645 ; C57.1@3881.69,1750 C56.1@3881.69,1820 ; C60.1@3930,806.69 3930,975 3945,990 U15.11@3945,1045 ; C22.1@4260.12,2154.94 C21.1@4310,2154.94 4312.56,2157.5 U5.15@4394.88,2157.5 4455,2157.5 v3(4480,2182.5) ; C9.1@4400,1960.06 4432.56,1960.06 4475,2002.5 4570,2002.5 U3.2@4570,1752.5 ; v1(4740,1770) C11.1@4740,1807.44
  Top Layer w30: v2(50,2285) FB5.1@50,2326.69 ; FB6.1@2763.31,4290 v2(2810,4290)
  other v1: 4360,1810 4777.5,4397.5 4055,4805
  other v3: 4470,2002.5
IGND: C23.1 C24.1 FB1.2 J1.5 P2.3 U5.2 U5.8 | length 920.5
  Top Layer w12: 4627.17,2879.04 4627.17,2520.33 4690,2457.5 U5.8@4755.12,2457.5
  Top Layer w20: v3(4660,2182.5) 4685,2157.5 U5.2@4755.12,2157.5 4837.44,2157.5 4840,2154.94 C24.1@4890,2154.94 ; P2.3@4755,2562.5 4755,2457.62 U5.8@4755.12,2457.5 ; FB1.2@4790,2941.12 v4(4790,3002.5)
MISO_0: "CPU0 GPIO / ADC / SPI / TWI / UART.13" "CPU0 SPI Bridge Select.3" CPU0_ISP.1 U14.7 | length 4234.4
  Top Layer w10: U14.7@805,1036.72 805,873.14 1099,579.14 1099,411 1200,310 1200,211.72 1250,161.72
  Bottom Layer w10: CPU0_ISP.1@245,1830 380,1695 725,1695 764.47,1655.53 764.47,1535.53 806,1494 806,1037.72 U14.7@805,1036.72 805,1030 929,906 1851.63,906 1909.16,848.47 2473.47,848.47 2525,900 2525,960 2570,1005
MISO_1: "CPU1 GPIO / ADC / SPI / TWI / UART.13" "CPU1 SPI Bridge Select.4" CPU1_ISP.1 U15.7 | length 3377.8
  Top Layer w10: U15.7@3545,1045 3545,838.39 3906,477.39 3906,319 3945,280 3945,215 3990,170
  Bottom Layer w10: 2570,340 2610.53,299.47 2711.84,299.47 2802.37,390 2890,390 3545,1045 3460,1130 2726.72,1130 2611.72,1245 CPU1_ISP.1@2610,1245
MOSI_0: "CPU0 GPIO / ADC / SPI / TWI / UART.11" "CPU0 SPI Bridge Select.1" CPU0_ISP.4 U14.6 | length 4799.3
  Top Layer w10: U14.6@705,1036.72 705,927.88 1067,565.88 1067,397.75 1105,359.75 1105,206.72 1150,161.72
  Bottom Layer w10: CPU0_ISP.4@345,1930 304.47,1889.47 229.86,1889.47 204.47,1864.08 204.47,1742.9 268.37,1679 620.03,1679 655,1644.03 655,1620 790,1485 790,1110 716.72,1036.72 U14.6@705,1036.72 851.72,890 1845,890 1902.53,832.47 2667.47,832.47 2710.53,875.53 2710.53,964.47 2670,1005
MOSI_1: "CPU1 GPIO / ADC / SPI / TWI / UART.11" "CPU1 SPI Bridge Select.2" CPU1_ISP.4 U15.6 | length 3282.2
  Top Layer w10: U15.6@3445,1045 3445,893.14 3835,503.14 3835,225 3890,170
  Bottom Layer w10: CPU1_ISP.4@2510,1345 2554.53,1300.47 2554.53,1212.97 2597.5,1170 2658.43,1170 2718.43,1110 3380,1110 3445,1045 3445,967.63 2883.37,406 2795.75,406 2729.75,340 2670,340
NetC9_2: C9.2 C10.2 C22.2 U3.1 U5.16 | length 652.5
  Top Layer w20: U5.16@4394.88,2107.5 4310,2107.5 4302.44,2099.94 C22.2@4260,2099.94 4260,1937.5 4292.44,1905.06 4399.88,1905.06 C9.2@4400,1904.94 C10.2@4400,1862.56 4452.44,1862.56 4479.45,1835.55 U3.1@4479.45,1770